# Altium PCB GPS_V2_2_PANEL.PcbDoc
Units mm, origin at the board's own origin, x right, y up, seen from the top; angles counter-clockwise.
Board outline 89.8 x 79.8 mm, 2 copper layers (Top Layer, Bottom Layer); 4 components, 0 nets, 8 pads, 0 vias.
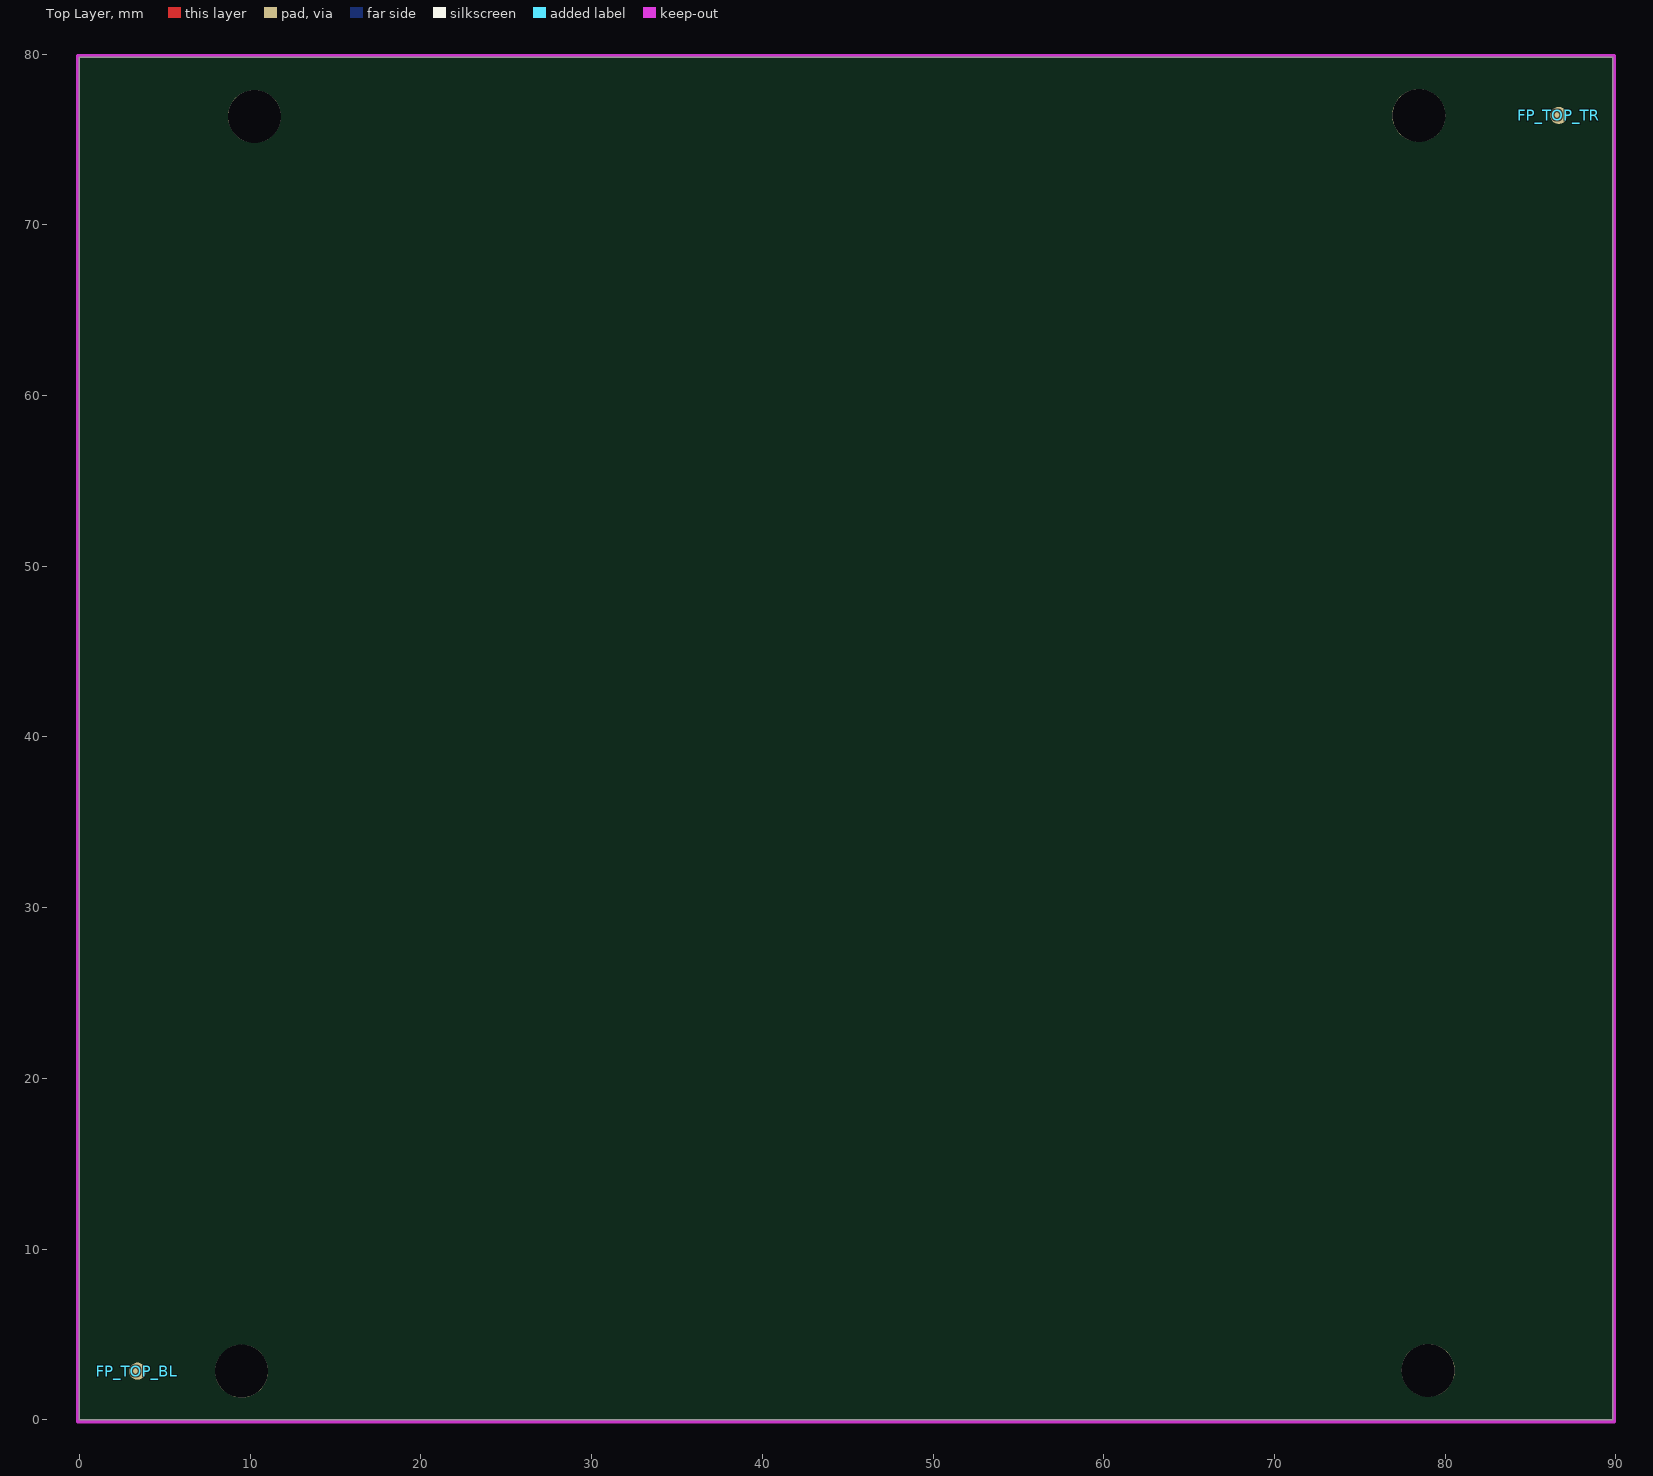
[diagram p0: Top Layer view]
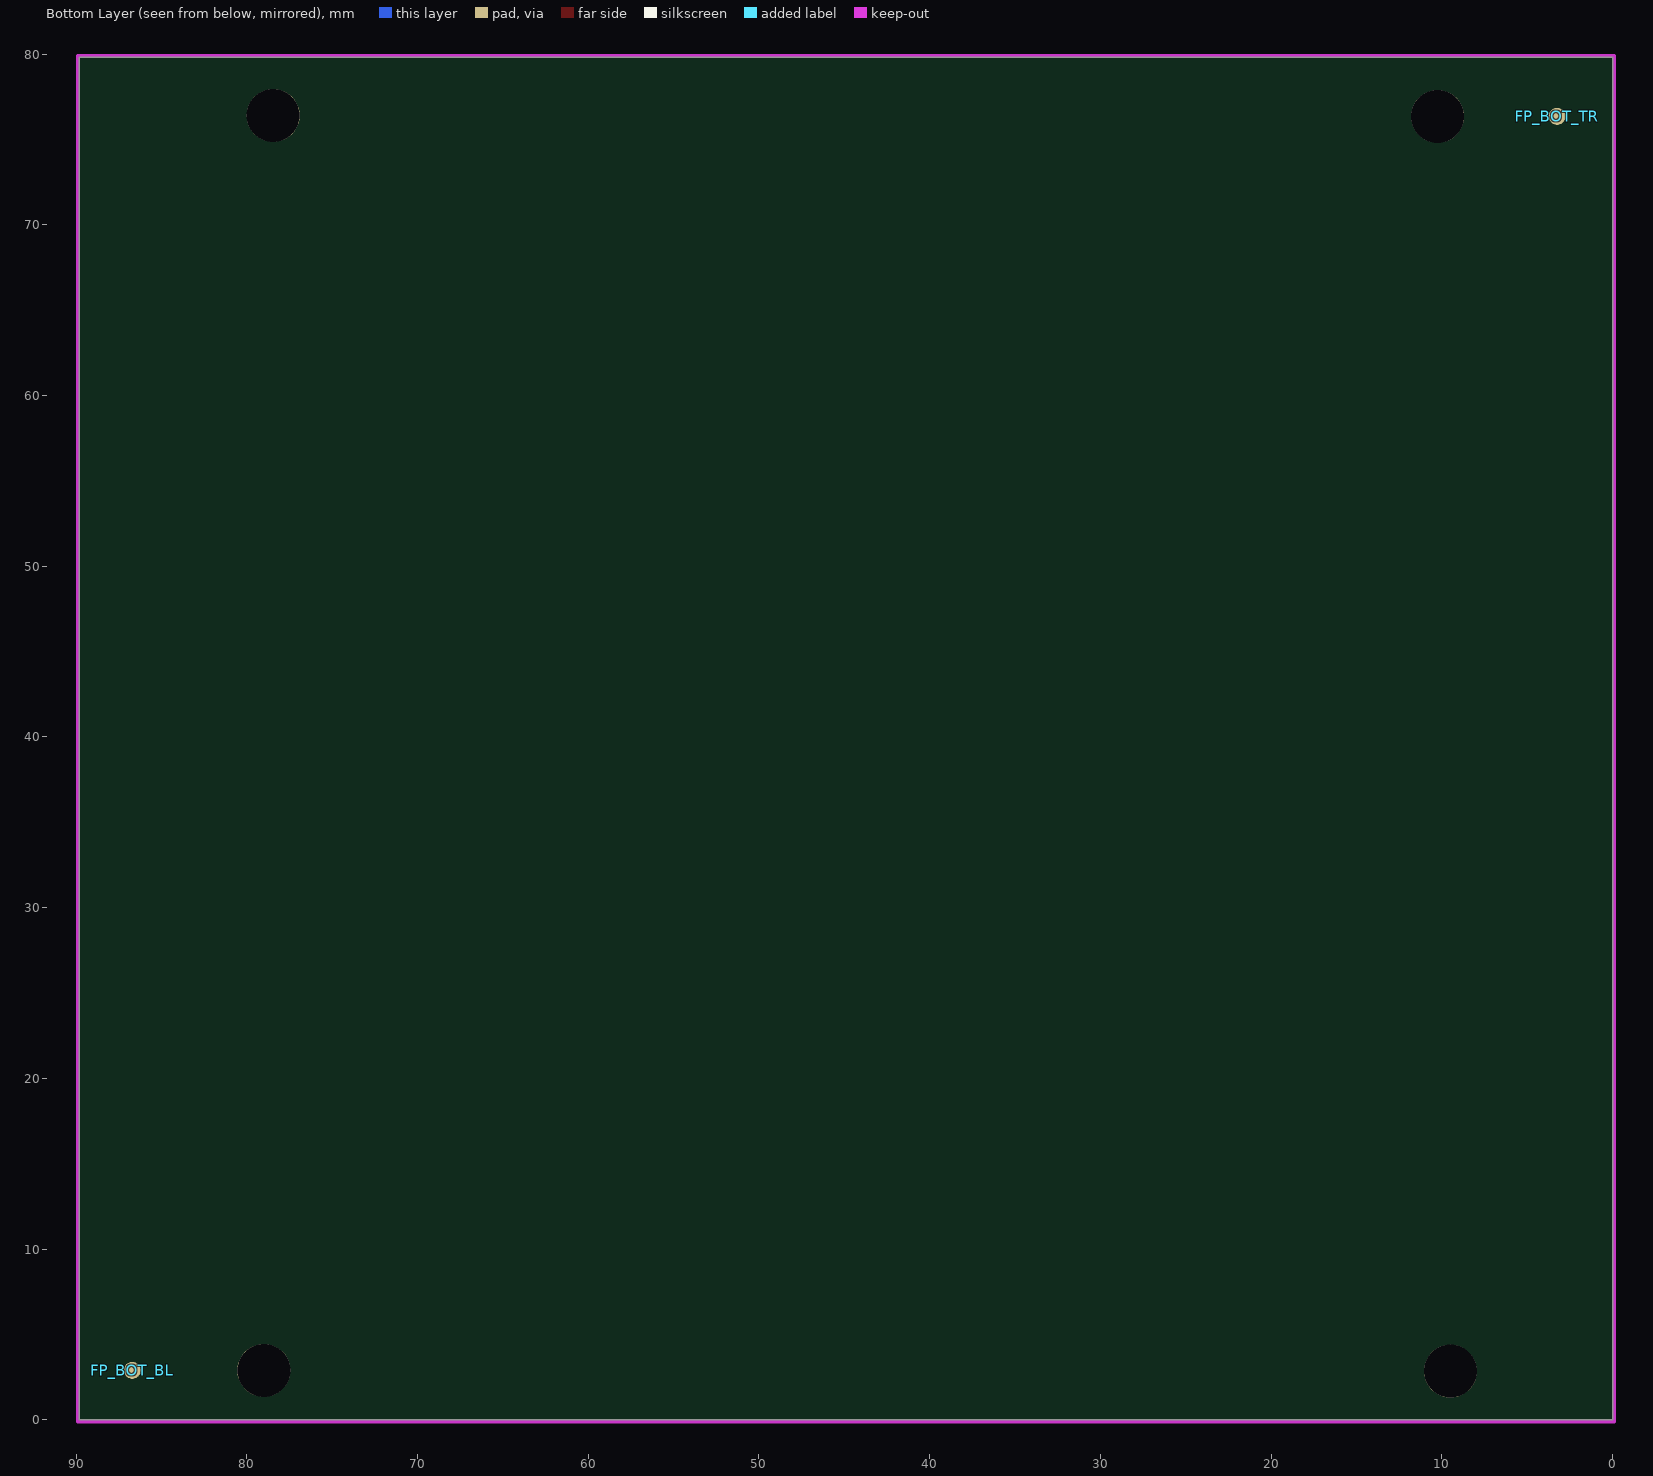
[diagram p1: Bottom Layer view, seen from below]

## Layer stack, top to bottom
Top Solder: solder mask 0.0102, Solder Resist, Dk 3.5
Top Layer: signal copper 0.0356
Dielectric 1: dielectric 0.32, FR-4, Dk 4.8
Bottom Layer: signal copper 0.0356
Bottom Solder: solder mask 0.0102, Solder Resist, Dk 3.5

## Board outline
0,0 89.8,0 89.8,79.8 0,79.8

## Design rules (kind name [scope] priority, off if disabled: settings)
Clearance [All] p1: gap=0.254 ignorepadtopadclearanceinfootprint=FALSE except(0: Arc-Hole Track-Hole SMDPad-Hole THPad-Hole Via-Hole Fill-Hole Poly-Hole Region-Hole Text-Hole)
PolygonConnect [All] p1: connectstyle=Relief reliefconductorwidth=0.254 reliefentries=4 polygonreliefangle="90 Angle" airgapwidth=0.254
RoutingVias [All] p1: holewidth=0.711 width=1.27 viastyle="Through Hole" minholewidth=0.711 minwidth=1.27 maxholewidth=0.711 maxwidth=1.27
SolderMaskExpansion [All] p1: expansion=0.102
Width [All] p1: maxlimit=0.254 minlimit=0.254 preferedwidth=0.254
30 further rules are at their usual default settings.

## Components (designator, comment, footprint, x,y, rotation, side; value= is the part's Value field where it differs from the comment)
FP_BOT_BL "Comment" FIDUCAL 86.7,2.9 r0 bottom
FP_BOT_TR "Comment" FIDUCAL 3.25,76.35 r0 bottom
FP_TOP_BL "Comment" FIDUCAL 3.4,2.85 r180 top
FP_TOP_TR "Comment" FIDUCAL 86.65,76.4 r180 top

## Footprints (in the part's own frame and the unit in brackets; to place one, negate y for a bottom-side part, rotate by r counter-clockwise, add the part's x,y. Pads: shape width x height; smd on the part's side, far side on the other; paste and mask are expansions set on the pad)
FIDUCAL [mm] "FIDUCAL MARKER"
  round 1 smd mask+1: FM(0,0)
  Top Layer pour cut-out: -1.5,0 -1.386,-0.574 -1.061,-1.061 -0.574,-1.386 0,-1.5 0,-1.5 0.574,-1.386 1.061,-1.061 1.386,-0.574 1.5,0 1.5,0 1.386,0.574 1.061,1.061 0.574,1.386 0,1.5 0,1.5 -0.574,1.386 -1.061,1.061 -1.386,0.574 -1.5,0

## Free pads (board coordinates)
  round 3.1 hole 3.1: 1(10.25,76.35) 2(9.5,2.85) 3(78.45,76.4) 4(79,2.9)

## Nets (pads, with @x,y where several pads share a name; then routed paths per layer and width w, separated by ;. In a path a pad name is that pad's centre, name@x,y a point inside that pad or via, vN(x,y) a via of type N, cw(c..) or ccw(c..) an arc to the next point about the centre after c; other vN are vias at no path point)
pads on no net: FP_BOT_BL.FM FP_BOT_TR.FM FP_TOP_BL.FM FP_TOP_TR.FM

## Keep-outs
Keep-Out Layer:
  lines w0.2: -0.1,-0.1 89.9,-0.1 89.9,79.9 -0.1,79.9 -0.1,-0.1

## Silkscreen, mask and mechanical layers (free items; w line width, h text height)
V Cut:
  lines w0.2: -8.4,5.55 95,5.55 ; -8.4,25.65 95,25.65 ; -8.4,29.15 95,29.15 ; -8.4,49.25 95,49.25 ; -8.4,52.75 95,52.75 ; -7.8,72.87 95,72.87 ; 6.5,-5.45 6.5,85 ; 34.6,-5.45 34.6,85 ; 38.6,-5.45 38.6,85 ; 83.2,-5.45 83.2,85
  text "V-CUT" at 7.9,85.55 h2 r90
  text "V-CUT" at 35.9,85.55 h2 r90
  text "V-CUT" at 39.9,85.55 h2 r90
  text "V-CUT" at 84.5,85.5 h2 r90
  text "V-CUT" at 95.6,71.6 h2
  text "V-CUT" at -19.4,71.55 h2
  text "V-CUT" at -19.1,52.05 h2
  text "V-CUT" at 95.9,51.75 h2
  text "V-CUT" at -19.1,48.25 h2
  text "V-CUT" at 95.9,48.25 h2
  text "V-CUT" at -19.4,27.95 h2
  text "V-CUT" at 95.6,27.85 h2
  text "V-CUT" at -19.4,24.35 h2
  text "V-CUT" at 95.65,24.3 h2
  text "V-CUT" at -19.4,4.35 h2
  text "V-CUT" at 95.6,4.25 h2
  text "V-CUT" at 7.8,-15.45 h2 r90
  text "V-CUT" at 35.9,-15.45 h2 r90
  text "V-CUT" at 39.9,-15.45 h2 r90
  text "V-CUT" at 84.5,-15.6 h2 r90

## Dimensions
89.9,79.9 to 89.9,-0.1 on Mechanical 1
-0.1,79.9 to 89.9,79.9 on Mechanical 1

## Panel: embedded boards
"..\..\02_MCU\02_PCB\MCU.PcbDoc" at 83.15,71.3, 3 rows x 1 columns, spacing 23.6 x 42.5, rotation 180
"GPS.PcbDoc" at 6.55,5.6, 3 rows x 1 columns, spacing 23.6 x 42.5, rotation 0